# EAGLE board CS42448_2 (EAGLE 7.2.0)
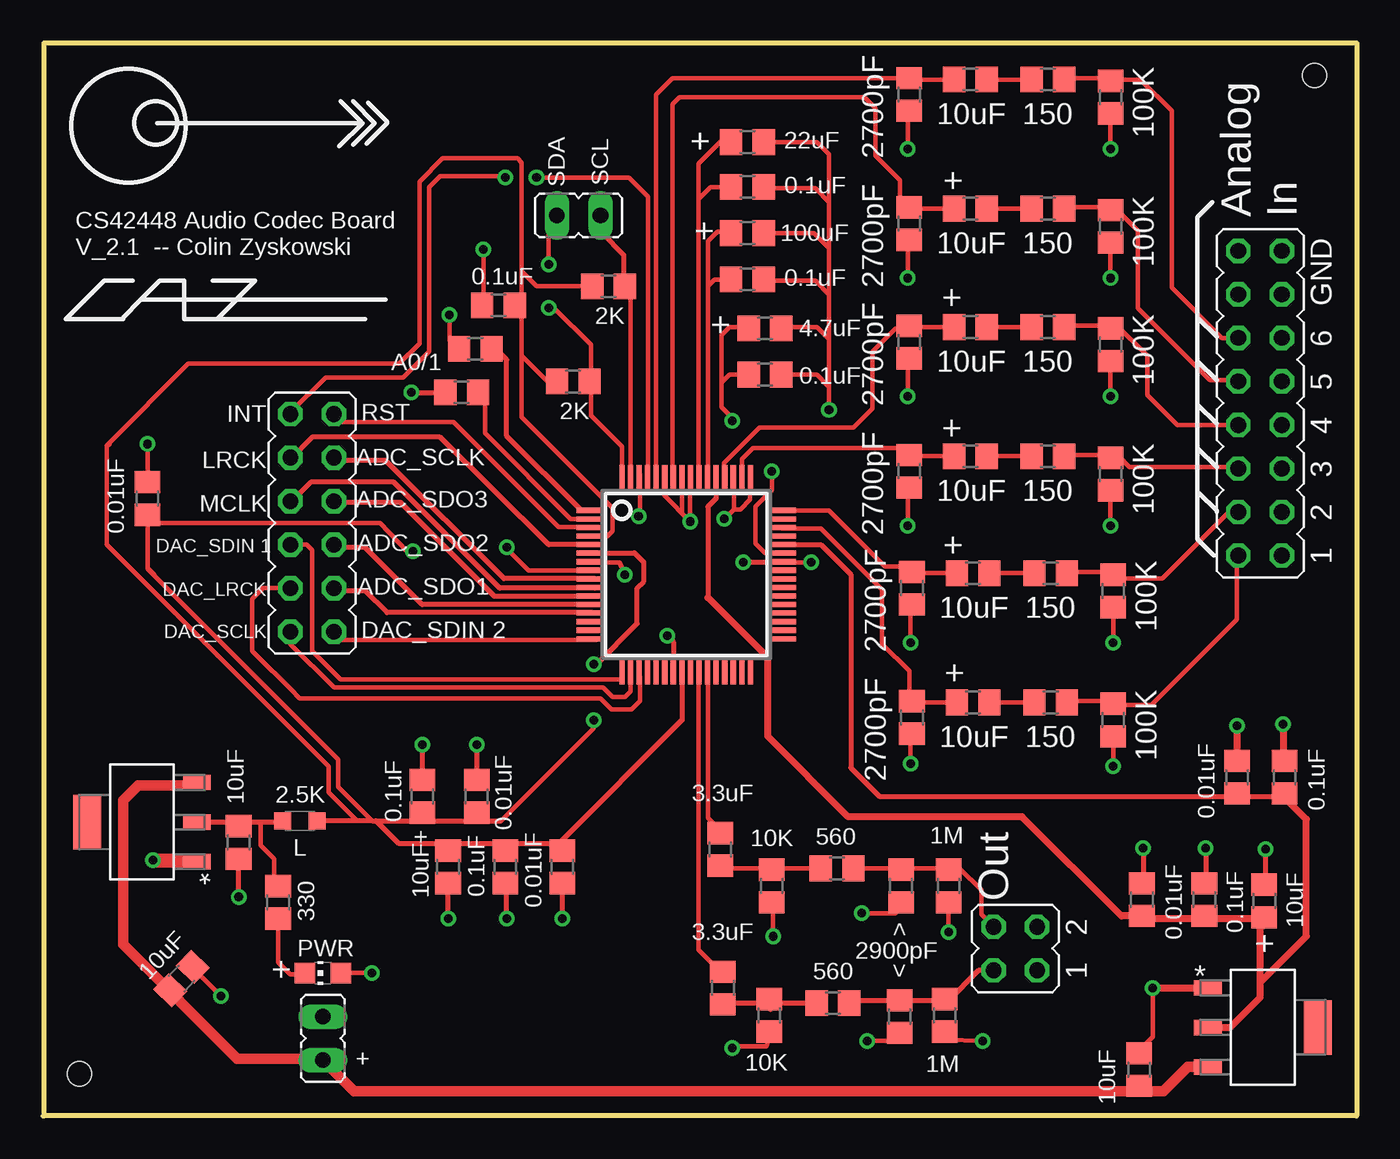
[diagram p0: board, top side]
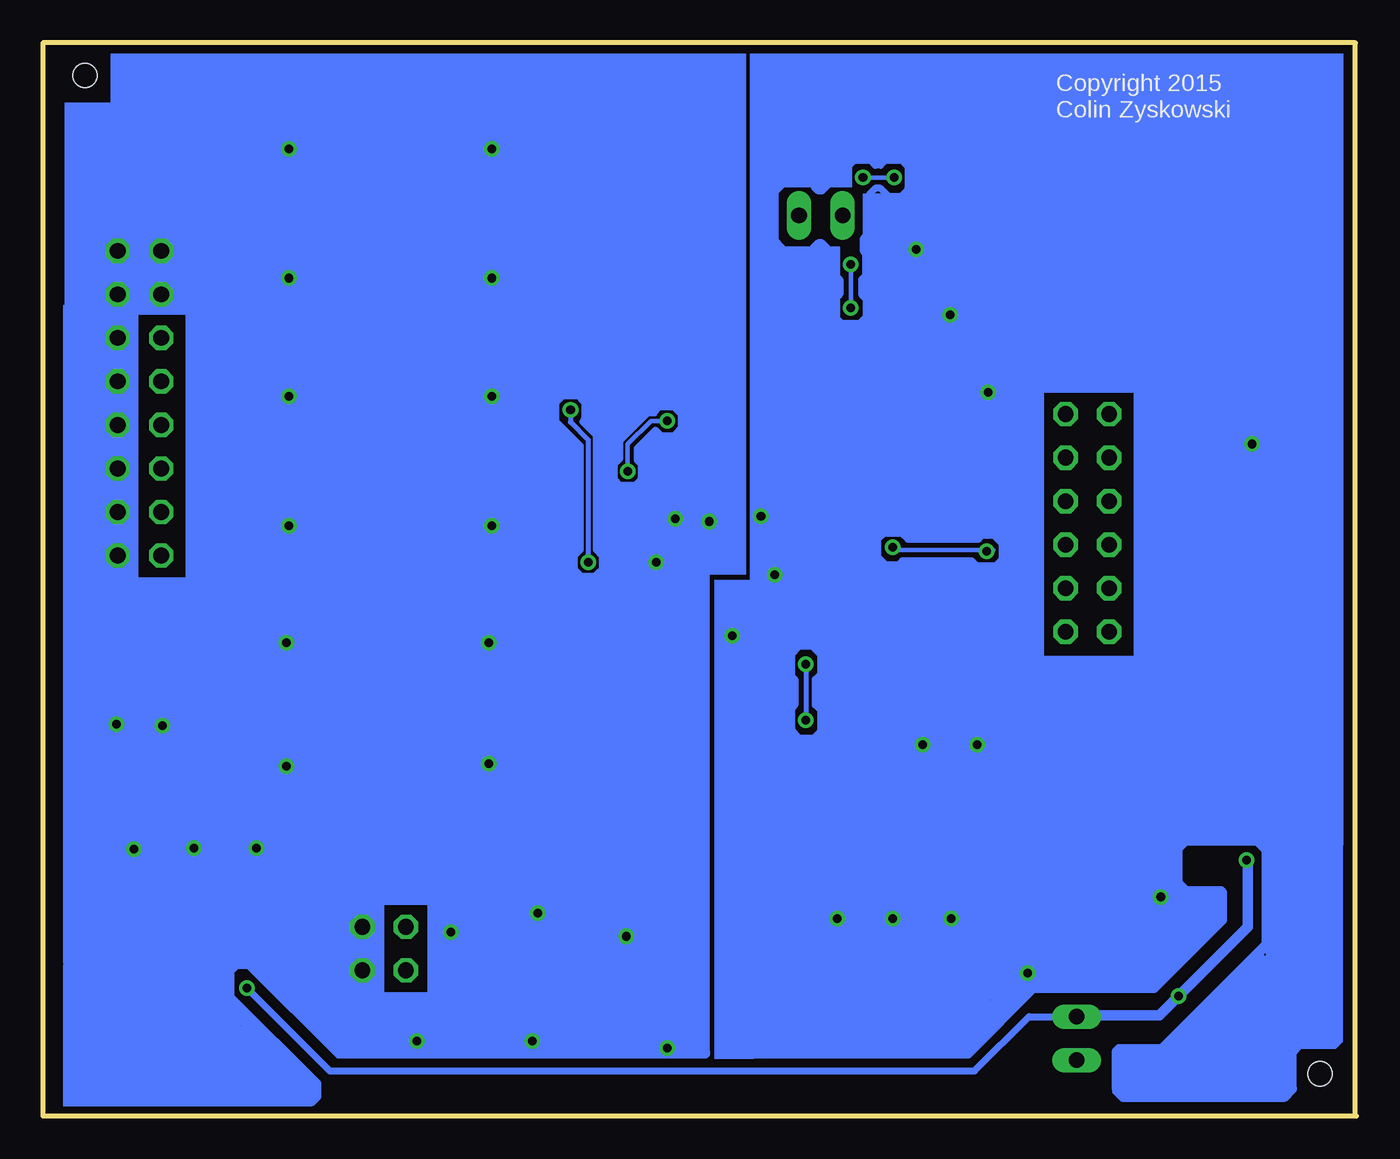
[diagram p1: board, bottom side, seen from below]

Size 76.68 x 62.63 mm. Coordinates in mm from the lower left corner, seen from the top.
Outline: 0,0 0.08,0
Outline: 0.08,0 0.08,62.63 76.68,62.63 76.68,0 0.08,0
Copper layers (1*16): Top 0.035mm / dielectric 1.5mm / Bottom 0.035mm
Design rules "default": minimum track width 10mil, minimum drill 24mil, track to track 8mil, track to pad 8mil, pad to pad 8mil, via to via 8mil, smd to smd 8mil, copper to edge 40mil, drill to drill 8mil, minimum pad ring 10mil, minimum via ring 8mil, stop-mask expansion 4mil, vias tented up to drill 0mil, thermal gap 10mil
Holes 1.4 mm at 2.14,2.46 74.22,60.72

## Footprints (pad centres in the part's own frame; a part is rotated, then mirrored left to right if it is on the bottom)
TQFP64 = smd 0.3 x 1.6: 1 -3.75,-5.6; 2 -3.25,-5.6; 3 -2.75,-5.6; 4 -2.25,-5.6; 5 -1.75,-5.6; 6 -1.25,-5.6; 7 -0.75,-5.6; 8 -0.25,-5.6; 9 0.25,-5.6; 10 0.75,-5.6; 11 1.25,-5.6; 12 1.75,-5.6; 13 2.25,-5.6; 14 2.75,-5.6; 15 3.25,-5.6; 16 3.75,-5.6; 33 3.75,5.6; 34 3.25,5.6; 35 2.75,5.6; 36 2.25,5.6; 37 1.75,5.6; 38 1.25,5.6; 39 0.75,5.6; 40 0.25,5.6; 41 -0.25,5.6; 42 -0.75,5.6; 43 -1.25,5.6; 44 -1.75,5.6; 45 -2.25,5.6; 46 -2.75,5.6; 47 -3.25,5.6; 48 -3.75,5.6 | smd 1.6 x 0.3: 17 5.6,-3.75; 18 5.6,-3.25; 19 5.6,-2.75; 20 5.6,-2.25; 21 5.6,-1.75; 22 5.6,-1.25; 23 5.6,-0.75; 24 5.6,-0.25; 25 5.6,0.25; 26 5.6,0.75; 27 5.6,1.25; 28 5.6,1.75; 29 5.6,2.25; 30 5.6,2.75; 31 5.6,3.25; 32 5.6,3.75; 49 -5.6,3.75; 50 -5.6,3.25; 51 -5.6,2.75; 52 -5.6,2.25; 53 -5.6,1.75; 54 -5.6,1.25; 55 -5.6,0.75; 56 -5.6,0.25; 57 -5.6,-0.25; 58 -5.6,-0.75; 59 -5.6,-1.25; 60 -5.6,-1.75; 61 -5.6,-2.25; 62 -5.6,-2.75; 63 -5.6,-3.25; 64 -5.6,-3.75
SOT230P700X180-4N = smd 1.626 x 0.889: 1 -3.2,2.311; 2 -3.2,0; 3 -3.2,-2.311 | smd 1.626 x 3.175: 4 3.2,0
JP6Q = drill 0.914 octagon: 1 -6.35,-1.27; 2 -6.35,1.27; 3 -3.81,-1.27; 4 -3.81,1.27; 5 -1.27,-1.27; 6 -1.27,1.27; 7 1.27,-1.27; 8 1.27,1.27; 9 3.81,-1.27; 10 3.81,1.27; 11 6.35,-1.27; 12 6.35,1.27
JP8Q = drill 0.914 octagon: 1 -8.89,-1.27; 2 -8.89,1.27; 3 -6.35,-1.27; 4 -6.35,1.27; 5 -3.81,-1.27; 6 -3.81,1.27; 7 -1.27,-1.27; 8 -1.27,1.27; 9 1.27,-1.27; 10 1.27,1.27; 11 3.81,-1.27; 12 3.81,1.27; 13 6.35,-1.27; 14 6.35,1.27; 15 8.89,-1.27; 16 8.89,1.27
JP2Q = drill 0.914 octagon: 1 -1.27,-1.27; 2 1.27,-1.27; 3 -1.27,1.27; 4 1.27,1.27
R0805 = smd 1.3 x 1.5: 1 -0.95,0; 2 0.95,0
JP1Y = drill 0.914 long: 1 0,-1.27; 2 0,1.27
L2012C = smd 1 x 1: 1 -1,0; 2 1,0
CHIP-LED0805 = smd 1.2 x 1.2: A 0,-1.05; C 0,1.05

## Placement (x,y rotation side)
E$1  [TQFP64]  37.54,31.59 270 top
E$2  [SOT230P700X180-4N]  5.79,17.14 180 top
E$3  [SOT230P700X180-4N]  71.2,5.16 0 top
E$4  [JP6Q]  15.72,34.61 90 top
E$5  [JP8Q]  71.04,41.59 90 top
E$6  [JP2Q]  56.75,9.76 90 top
E$7  [R0805]  33.02,48.42 0 top
E$8  [R0805]  26.59,47.31 0 top
E$9  [R0805]  23.65,14.53 90 top
E$10  [R0805]  26.99,14.53 90 top
E$11  [R0805]  30.32,14.53 90 top
E$12  [R0805]  22.15,18.65 90 top
E$13  [R0805]  25.32,18.65 90 top
E$14  [R0805]  30.96,42.86 0 top
E$15  [JP1Y]  31.27,52.55 90 top
E$16  [JP1Y]  16.35,4.52 180 top
E$17  [R0805]  50.56,45.16 90 top
E$18  [R0805]  54.13,46.04 0 top
E$19  [R0805]  58.66,46.04 0 top
E$20  [R0805]  62.31,45.01 90 top
E$21  [R0805]  50.56,37.62 90 top
E$22  [R0805]  54.13,38.5 0 top
E$23  [R0805]  58.66,38.5 0 top
E$24  [R0805]  62.31,37.47 90 top
E$25  [R0805]  50.72,30.8 90 top
E$26  [R0805]  54.29,31.67 0 top
E$27  [R0805]  58.82,31.67 0 top
E$28  [R0805]  62.47,30.64 90 top
E$29  [R0805]  50.72,23.26 90 top
E$30  [R0805]  54.29,24.13 0 top
E$31  [R0805]  58.82,24.13 0 top
E$32  [R0805]  62.47,23.1 90 top
E$33  [R0805]  50.56,59.61 90 top
E$34  [R0805]  54.13,60.48 0 top
E$35  [R0805]  58.66,60.48 0 top
E$36  [R0805]  62.31,59.45 90 top
E$37  [R0805]  50.56,52.07 90 top
E$38  [R0805]  54.13,52.94 0 top
E$39  [R0805]  58.66,52.94 0 top
E$40  [R0805]  62.31,51.91 90 top
E$41  [R0805]  41.12,56.83 180 top
E$42  [R0805]  41.12,54.21 180 top
E$43  [R0805]  42.15,45.96 180 top
E$44  [R0805]  41.12,48.82 180 top
E$45  [R0805]  41.12,51.51 180 top
E$46  [R0805]  42.15,43.26 180 top
E$47  [R0805]  39.53,15.56 90 top
E$48  [R0805]  46.35,14.45 0 top
E$49  [R0805]  52.86,13.41 90 top
E$50  [R0805]  42.55,13.41 90 top
E$51  [R0805]  50.09,13.41 90 top
E$52  [R0805]  39.69,7.46 90 top
E$53  [R0805]  46.12,6.59 0 top
E$54  [R0805]  52.63,5.87 90 top
E$55  [R0805]  42.39,5.87 90 top
E$56  [R0805]  50.01,5.79 90 top
E$57  [R0805]  6.11,36.04 90 top
E$58  [R0805]  71.28,12.54 270 top
E$59  [R0805]  67.79,12.62 270 top
E$60  [R0805]  64.14,12.62 270 top
E$61  [R0805]  72.47,19.76 270 top
E$62  [R0805]  69.69,19.76 270 top
E$63  [R0805]  24.45,42.23 0 top
E$64  [R0805]  25.24,44.77 0 top
E$65  [R0805]  8.1,8.02 46.2 top
E$66  [L2012C]  15,17.22 0 top
E$67  [CHIP-LED0805]  16.35,8.33 90 top
E$68  [R0805]  13.73,12.46 90 top
E$69  [R0805]  11.43,15.95 90 top
E$70  [R0805]  63.98,2.7 90 top

## Library data of the parts
E$1 = plxtech
E$2 E$3 = LD1117s_VoltageRegulator
E$4 E$6 E$15 E$16 = jumper
E$5 = jumper8
E$7-E$14 E$17-E$66 E$68-E$70 = eagle-ltspice
E$67 = led

## Nets
S$3: E$15.2
S$31: E$4.4
S$35: E$4.2
S$69: E$5.8
S$71: E$5.12
S$99: E$6.4
S$110: E$16.1

## Tracks (layer width: path | path; a pad name or v marks a point on that pad's centre or on a via)
S$1
  Top 0.254: 34.29,24.92 34.29,25.4
S$2
  Top 0.254: 13.73,11.35 13.73,8.97 14.45,8.26 15.32,8.26
S$3  (via drill 0.5 pad 0.25)
  Top 0.254: v29.53,47.15 29.84,47.15 31.99,45.01 31.99,40.88 33.81,39.05 33.81,37.39 | v29.53,49.69 29.53,52.07 E$15.2
  Bottom 0.254: v29.53,47.15 v29.53,49.69
S$4
  Top 0.254: 31.75,34.85 30.8,34.85 25.8,39.85 25.8,41.83 25.48,42.15
S$5
  Top 0.305: 31.43,35.32 27.07,39.69 27.07,44.13 26.27,44.93
S$6  (via drill 0.5 pad 0.25)
  Top 0.254: v25.72,50.56 25.72,47.39
S$8
  Top 0.305: 32.15,33.34 29.53,33.34 23.18,39.61 15.72,39.61 14.37,38.26
S$9
  Top 0.305: 32.23,31.35 26.91,31.35 20,38.26 16.83,38.26
S$10
  Top 0.305: 32.23,30.8 26.67,30.8 20.48,36.99 15.64,36.99 14.37,35.72
S$11  (via drill 0.5 pad 0.25)
  Top 0.305: v30.32,11.51 30.32,13.34
S$12  (via drill 0.5 pad 0.25)
  Top 0.305: v25.32,21.67 25.32,19.61
S$13
  Top 0.254: 6.11,34.92 6.11,31.99 6.51,31.59
S$14  (via drill 0.5 pad 0.25)
  Top 0.305: 36.83,26.27 36.83,27.62 v36.43,28.02
S$15
  Top 0.305: 32.62,52.63 32.62,51.51 33.89,50.24 33.89,48.5 33.97,48.42
S$16  (via drill 0.5 pad 0.25)
  Top 0.305: v64.21,15.64 64.21,13.49
S$17
  Top 0.254: 31.51,34.37 30.08,34.37 23.97,40.48 17.14,40.48 16.91,40.72
S$18  (via drill 0.5 pad 0.25)
  other vias: 27.07,33.18
S$19
  Top 0.254: 34.29,37.23 34.29,47.94 33.89,48.34
S$20  (via drill 0.5 pad 0.25)
  Top 0.254: 31.99,32.31 33.66,32.31 v33.97,31.59
S$21
  Top 0.305: 31.99,30.32 26.35,30.32 20.88,35.8 16.99,35.8 16.91,35.72
S$22
  Top 0.305: 32.07,29.84 22.15,29.84 18.81,33.18 16.99,33.18
S$23
  Top 0.305: 32.07,29.37 20.08,29.37 18.81,30.64 16.91,30.64
S$24  (via drill 0.5 pad 0.25)
  Top 0.254: v21.59,32.94 21.27,32.94 19.68,34.61 6.51,34.61 6.19,34.85
S$25
  Bottom 0.254: 21.19,33.02 27.07,33.02
S$26
  Top 0.254: 32.07,31.83 28.34,31.83 27.07,33.1
S$27  (via drill 0.5 pad 0.25)
  Top 0.254: v6.11,39.21 6.11,37.23
S$28  (via drill 0.5)
  Top 0.813: v6.43,14.92 9.05,14.92 9.05,14.84
S$29
  Top 0.406: 8.57,19.76 8.89,19.45
S$30  (via drill 0.5 pad 0.25)
  Top 0.254: 41.27,37.47 41.27,35.96 40.72,35.4 40.32,35.4 | 40.32,37.39 40.32,35.4 | 40.32,35.4 v39.77,34.85
S$31
  Top 0.254: 34.85,25.64 34.85,24.21 34.37,23.73 33.18,23.73 32.54,24.37 28.57,24.37 28.34,24.37 15,24.37 14.76,24.61 14.68,24.69 12.22,27.15 12.22,30.16 12.86,30.8 E$4.4
S$32
  Top 0.254: 3.81,39.21 8.49,43.89 20.8,43.89 21.99,45.09 21.99,54.53 23.34,55.88 27.7,55.88 27.94,55.64 27.94,49.29 | 32.07,48.42 28.81,48.42 27.94,49.29 | 29.69,42.86 29.45,42.86 27.94,44.37 | 27.94,44.37 27.94,49.29 | 27.94,44.37 27.94,40.8 33.26,35.48 33.26,34.13 32.94,33.81 31.67,33.81
S$33
  Top 0.254: 32.31,27.78 17.3,27.78 16.91,28.18
S$34  (via drill 0.5 pad 0.25)
  Top 0.254: v32.15,23.1 32.15,22.62 26.75,17.22 | 6.11,31.91 17.22,20.8 17.22,19.21 19.21,17.22 | 18.34,17.22 16.67,18.89 16.67,20.4 3.73,33.34 3.73,39.05 3.89,39.21 3.81,39.21 3.73,39.13
  Top 0.305: 31.99,32.86 34.53,32.86 35.08,32.31 35.08,31.19 34.69,30.8 34.69,28.73 32.31,26.35 v32.15,26.35 | 37.31,26.19 37.31,23.1 30.08,15.88 20.8,15.88 19.45,17.22 | 19.45,17.22 26.75,17.22 | 19.45,17.22 19.21,17.22 18.34,17.22 15.95,17.22
  Bottom 0.305: v32.15,26.35 v32.15,23.1
S$35
  Top 0.254: E$4.2 14.45,27.54 16.99,25 32.7,25 33.26,24.45 33.97,24.45 34.29,24.77 34.29,25.56
S$36
  Top 0.254: 62.47,46.12 59.85,46.12 59.77,46.04
S$37
  Top 0.254: 57.63,46.04 55.32,46.04 55.24,46.12
S$38
  Top 0.254: 53.18,46.04 50.8,46.04 50.72,46.12
S$39  (via drill 0.5 pad 0.25)
  Top 0.254: v50.48,41.99 50.48,44.13
S$40  (via drill 0.5 pad 0.25)
  Top 0.254: v62.31,41.99 62.31,43.97
S$41
  Top 0.254: 62.47,38.58 59.85,38.58 59.77,38.5
S$42
  Top 0.254: 57.63,38.5 55.32,38.5 55.24,38.58
S$43
  Top 0.254: 53.18,38.5 50.8,38.5 50.72,38.58
S$44  (via drill 0.5 pad 0.25)
  Top 0.254: v50.48,34.45 50.48,36.59
S$45  (via drill 0.5 pad 0.25)
  Top 0.254: v62.31,34.45 62.31,36.43
S$46
  Top 0.254: 62.63,31.75 60.01,31.75 59.93,31.67
S$47
  Top 0.254: 57.78,31.67 55.48,31.67 55.4,31.75
S$48
  Top 0.254: 53.34,31.67 50.96,31.67 50.88,31.75
S$49  (via drill 0.5 pad 0.25)
  Top 0.254: v50.64,27.62 50.64,29.77
S$50  (via drill 0.5 pad 0.25)
  Top 0.254: v62.47,27.62 62.47,29.61
S$51
  Top 0.254: 62.63,24.21 60.01,24.21 59.93,24.13
S$52
  Top 0.254: 57.78,24.13 55.48,24.13 55.4,24.21
S$53
  Top 0.254: 53.34,24.13 50.96,24.13 50.88,24.21
S$54  (via drill 0.5 pad 0.25)
  Top 0.254: v50.64,20.56 50.64,22.23
S$55  (via drill 0.5 pad 0.25)
  Top 0.254: v62.47,20.4 62.47,22.07
S$56
  Top 0.254: 50.24,45.88 50.32,45.96 | 50.32,45.96 49.77,45.96 48.42,44.61 48.42,41.27 47.31,40.16 41.83,40.16 39.77,38.1 39.77,37.23 | 50.32,45.96 50.4,46.04
S$57
  Top 0.254: 57.63,60.48 55.32,60.48 55.24,60.56
S$58
  Top 0.254: 53.18,60.48 50.8,60.48 50.72,60.56
S$59  (via drill 0.5 pad 0.25)
  Top 0.254: v50.48,56.44 50.48,58.58
S$60  (via drill 0.5 pad 0.25)
  Top 0.254: v62.31,56.44 62.31,58.42
S$61
  Top 0.254: 62.47,53.02 59.85,53.02 59.77,52.94
S$62
  Top 0.254: 57.63,52.94 55.32,52.94 55.24,53.02
S$63
  Top 0.254: 53.18,52.94 50.8,52.94 50.72,53.02
S$64  (via drill 0.5 pad 0.25)
  Top 0.254: v50.48,48.9 50.48,51.04
S$65  (via drill 0.5 pad 0.25)
  Top 0.254: v62.31,48.9 62.31,50.88
S$66
  Top 0.254: 69.69,32.7 69.69,28.97 64.69,23.97 62.39,23.97
S$67
  Top 0.254: 69.85,35.32 69.29,35.32 65.33,31.35 62.31,31.35 62.15,31.51
S$68
  Top 0.254: 69.77,37.86 63.42,37.86 62.79,38.5
S$69
  Top 0.254: E$5.8 66.2,40.32 64.45,42.07 64.45,44.37 62.55,46.28
S$70
  Top 0.254: 69.93,42.94 68.1,42.94 63.9,47.15 63.9,51.67 62.55,53.02
S$71
  Top 0.254: E$5.12 68.82,45.4 65.88,48.34 65.88,58.66 64.06,60.48 62.15,60.48 62.07,60.56 | 62.47,60.56 62.07,60.56 | 62.07,60.56 59.85,60.56 59.77,60.48
S$72  (via drill 0.5 pad 0.25)
  Top 0.254: 34.85,37.47 34.85,35.08 v34.77,35
S$73
  Top 0.254: 35.8,37.23 35.8,59.61 36.75,60.56 50.48,60.56
S$74  (via drill 0.5 pad 0.25)
  Top 0.254: 37.78,37.54 v37.78,34.69 | 37.31,37.39 37.31,35.16 v37.78,34.69 | 36.27,37.23 36.27,36.2 v37.78,34.69
S$75
  Top 0.254: 50.72,60.48 50.8,60.56
S$76
  Top 0.254: 40.8,37.07 40.8,38.34 41.43,38.97 50.24,38.97 50.64,38.58
S$77
  Top 0.254: 43.1,35.32 45.88,35.32 49.13,32.07 50.72,32.07 50.88,32.23
S$78
  Top 0.254: 43.1,34.29 45.4,34.29 48.97,30.72 48.97,27.54 50.56,25.96 50.56,24.45 50.72,24.29
S$79
  Top 0.254: 43.1,32.31 45.01,32.31
S$80  (via drill 0.5 pad 0.25)
  other vias: 44.85,32.31
S$81
  Top 0.254: 36.75,37.15 36.75,59.05 37.15,59.45 47.94,59.45 48.58,58.82 48.58,56.04 50.01,54.61 50.01,53.66 50.64,53.02
S$82
  Top 0.254: 50.48,52.86 50.56,52.94
S$83
  Top 0.254: 38.26,37.15 38.26,53.5 | 38.26,53.5 38.26,55.56 39.61,56.91 40.08,56.91 | 40.08,54.21 38.97,54.21 38.26,53.5
S$84
  Top 0.254: 38.81,37.23 38.81,48.42 | 38.81,48.42 38.81,51.04 39.37,51.59 40.24,51.59 | 40.08,48.82 39.21,48.82 38.81,48.42
S$85
  Top 0.254: 41.99,54.13 45.09,54.13 45.88,53.34 | 45.88,53.34 45.88,50.64 | 45.88,50.64 45.88,47.94 | 45.88,47.94 45.88,45.32 | 45.88,45.32 45.88,41.2 | 42.07,56.83 45.16,56.83 45.88,56.12 45.88,53.34 | 42.15,51.51 45.01,51.51 45.88,50.64 | 42.15,48.74 45.09,48.74 45.88,47.94 | 43.26,46.04 45.16,46.04 45.88,45.32
S$86  (via drill 0.5 pad 0.25)
  Bottom 0.305: v45.88,41.2 45.88,40.48 44.85,39.45 44.85,32.31
S$87  (via drill 0.5 pad 0.25)
  Top 0.254: 43.58,32.86 42.15,32.86 41.59,33.42 41.59,35.56 42.55,36.51 v42.55,37.62
  Bottom 0.254: v42.55,37.62 42.55,39.21 41.2,40.56 40.32,40.56 40.24,40.48
S$88  (via drill 0.5 pad 0.25)
  Top 0.254: v40.24,40.56 40.24,40.72 39.61,41.35 39.61,42.78 | 39.61,42.78 39.61,45.56 40.08,46.04 41.2,46.04 | 41.04,43.26 40.08,43.26 39.61,42.78
S$89
  Top 0.254: 43.26,43.26 45.16,43.26 45.8,42.62
S$90
  Bottom 0.406: 37.07,3.73 37.07,15.32 37.15,15.4
S$91
  Top 0.254: 39.77,14.45 42.55,14.45 | 42.55,14.45 42.62,14.37 | 42.55,14.45 45.4,14.45
S$92
  Top 0.254: 47.55,14.45 52.63,14.45
S$93
  Top 0.254: 42.39,6.27 42.47,6.19
S$94
  Top 0.305: 39.93,6.59 45.09,6.59
S$95
  Top 0.254: 53.26,14.21 53.02,14.45
S$96
  Top 0.305: 55.4,8.49 54.61,8.49 52.78,6.67
S$97  (via drill 0.5 pad 0.25)
  Top 0.254: v42.62,10.48 42.62,12.22
S$98  (via drill 0.5 pad 0.25)
  other vias: 40.24,3.97
S$99
  Top 0.254: E$6.4 54.77,11.75 54.77,13.18 53.5,14.45 52.94,14.45
S$100  (via drill 0.5 pad 0.25)
  Top 0.254: v54.85,4.37 52.63,4.45 52.55,4.52
S$101  (via drill 0.5 pad 0.25)
  Top 0.254: v48.1,4.37 50.32,4.37
S$102  (via drill 0.5 pad 0.25)
  Top 0.254: v47.78,11.83 49.77,11.83 50.09,12.14
S$103  (via drill 0.5)
  Top 0.406: v64.77,7.46 68.1,7.46
  Bottom 0.406: v64.77,7.46 59.93,2.62 22.3,2.62 19.13,5.79 16.27,5.79 16.11,5.95
S$104
  Top 0.254: 38.81,25.4 38.81,22.3 38.81,22.23 38.81,17.38 39.53,16.67
S$105
  Top 0.61: 16.35,3.33 11.35,3.33 4.68,10 4.68,18.41 5.56,19.29 8.97,19.29 9.13,19.45
S$106
  Top 0.305: 64.06,11.91 64.06,11.27
S$107  (via drill 0.5)
  Top 0.254: 35.32,37.78 35.32,53.66 34.21,54.77 v28.81,54.77 28.73,54.77
  Bottom 0.254: v26.99,54.77 v28.81,54.77
S$108  (via drill 0.5)
  Top 0.406: v69.69,22.78 69.69,20.8
S$109
  Top 0.305: 72.39,20.64 72.39,21.11
S$110  (via drill 0.5)
  Top 0.254: v10.4,6.99 8.73,8.65
  Bottom 0.61: 6.35,14.92 6.35,11.03 v10.4,6.99 11.51,5.87 16.27,5.87 E$16.1
S$111  (via drill 0.5 pad 0.25)
  Top 0.305: v22.15,21.67 22.15,19.76
S$112
  Top 0.254: 14.45,41.04 16.51,43.1 21.03,43.1 22.54,44.61 22.54,54.21 23.18,54.85 26.99,54.85
S$113  (via drill 0.5 pad 0.25)
  Top 0.305: v23.65,11.51 23.65,13.34
S$114  (via drill 0.5 pad 0.25)
  Top 0.305: v27.07,11.51 27.07,13.41
S$115  (via drill 0.5)
  Top 0.406: v72.39,22.86 72.39,20.95 72.47,20.88
S$116  (via drill 0.5 pad 0.25)
  Top 0.305: v71.36,15.56 71.36,13.34
S$117  (via drill 0.5 pad 0.25)
  Top 0.305: v67.87,15.64 67.87,13.34
S$118  (via drill 0.5 pad 0.25)
  Top 0.254: v52.86,10.72 52.86,12.46
S$120
  Top 0.254: 40.24,4.05 42.23,4.05 42.47,4.76
S$121
  Top 0.305: 39.29,37.62 39.29,36.04 38.81,35.56 38.81,30.24 | 71.28,11.83 71.28,11.51 71.28,11.03 | 43.5,33.34 45.4,33.34 47.15,31.59 47.15,20.32 48.82,18.65 72.39,18.65 72.47,18.65 72.71,18.89
  Top 0.406: 68.34,5.16 69.29,5.16 71.04,6.91 71.04,7.78 | 71.04,7.78 73.74,10.48 73.74,17.3 72.39,18.65 | 71.04,7.78 71.04,11.27 71.28,11.51 64.37,11.51 64.21,11.67 62.94,11.67 57.15,17.46 46.99,17.46 42.31,22.15 42.31,26.75 38.81,30.24
S$122
  Top 0.305: 67.79,11.91 67.79,11.19
S$123
  Top 0.61: 68.26,2.86 66.83,2.86 65.41,1.43 18.18,1.43 16.43,3.17
S$124
  Top 0.406: 63.9,11.43 63.82,11.51
S$125
  Top 0.254: 38.26,25.4 38.26,22.7 38.26,22.62 38.26,9.68 39.61,8.33
S$126
  Bottom 0.305: 4.29,1.35 4.05,1.35 3.65,1.75 3.65,3.65 3.25,4.05 1.27,4.05 1.03,4.29 1.03,16.03 1.43,16.43 1.43,16.19 0.95,15.72 0.95,4.37 3.1,4.37 3.89,3.57 3.89,1.83 4.05,1.67 4.05,1.91 4.13,1.98 5.08,1.98 5.16,2.06 5.16,15.8 5.24,15.88 1.43,15.88 1.11,15.56 5,15.56 5.08,15.64 5.08,2.38 4.92,2.22 4.05,2.22 4.05,15.56 4.13,15.64 | 4.13,15.64 4.52,15.64 | 4.52,15.64 4.6,15.64 4.92,15.32 4.92,2.54 4.84,2.46 4.29,2.46 4.29,15.32 4.68,15.32 4.68,2.62 4.52,2.62 4.52,15.64 | 4.13,15.64 3.97,15.64 3.81,15.48 3.81,3.89 3.57,4.13 3.57,15.4 3.41,15.4 3.41,4.45 3.33,4.37 3.25,4.37 3.17,4.45 3.17,15.4 1.19,15.4 1.19,4.52
S$127
  Top 0.305: 46.99,6.75 52.55,6.75 52.63,6.83
S$128
  Bottom 0.254: 39.61,39.77 41.27,39.77 | 41.27,39.77 42.07,38.97 42.07,38.26 41.83,38.02 | 41.83,38.02 41.83,38.81 41.91,38.89 41.83,38.89 41.12,39.61 39.77,39.61 39.69,39.69 39.69,38.34 39.77,38.26 41.67,38.26 41.67,38.81 41.04,39.45 39.93,39.45 39.85,39.37 39.85,38.42 41.51,38.42 41.51,38.73 41.43,38.73 40.88,39.29 40.01,39.29 40.01,38.66 40.08,38.58 41.35,38.58 40.8,39.13 40.24,39.13 40.24,38.97 40.08,38.81 40.96,38.81 41.04,38.73 40.96,38.73 40.72,38.97 40.32,38.97 40.32,39.53 40.88,40.08 40.96,40.08 41.27,39.77 | 41.83,36.91 41.83,37.15 41.83,38.02
  Bottom 0.305: 42.07,36.83 42.07,36.91 41.83,37.15
S$129
  Bottom 0.254: 41.91,40.48 41.2,41.2 41.43,41.2 41.83,40.8 41.83,41.04 41.75,41.12
S$130
  Bottom 0.254: 43.18,39.13 42.94,39.37 | 42.94,39.37 41.35,40.96 | 41.35,40.96 41.04,41.27 41.35,41.27 43.26,39.37 43.26,39.61 42.47,40.4 42.7,40.4 43.18,39.93 43.18,40.24 43.02,40.4 | 41.35,40.96 40.96,40.96 40.72,41.27 40.88,41.2 41.04,41.04 | 42.94,39.37 42.94,38.34 43.18,38.1 43.18,38.97 43.1,39.05
S$131
  Bottom 0.254: 39.53,40.96 39.85,41.27
S$132
  Bottom 0.305: 39.77,39.69 39.77,39.85 39.45,40.16 39.45,40.96 39.53,41.04 39.53,44.13 35.8,44.13 35.8,37.94 39.05,37.94 39.61,38.5 39.61,39.61 39.37,39.85 39.37,43.81 39.29,43.89 39.21,43.89 | 39.21,43.89 36.04,43.89 36.04,38.26 39.13,38.26 39.21,38.34 39.21,39.53 | 39.21,39.53 39.21,39.61 | 39.21,39.61 39.37,39.77 39.37,38.58 39.45,38.5 39.45,39.29 39.21,39.53 | 39.21,39.61 39.21,43.89
S$133
  Bottom 0.254: 44.05,39.29 45.24,40.48 45.16,40.64
S$134
  Bottom 0.254: 45.09,41.51 45.16,41.67 45.48,41.99
S$135
  Bottom 0.254: 46.75,41.43 46.75,41.51 46.28,41.99
S$136
  Bottom 0.254: 44.13,39.53 44.93,40.32 44.29,40.32 44.21,40.24 | 44.21,40.24 44.21,40.01 44.29,39.93 44.61,40.24 44.21,40.24
S$137
  Bottom 0.254: 45.16,31.51 45.64,31.99
S$138
  Bottom 0.254: 44.45,31.59 44.21,31.83
S$139
  Bottom 0.254: 44.21,32.78 44.45,33.02 44.45,39.77 44.05,40.16 44.05,39.53 44.37,39.21 44.37,33.1 44.29,33.02
S$140
  Bottom 0.254: 45.56,32.7 45.24,33.02 45.24,39.13 45.56,39.45 | 45.56,39.45 45.56,39.37 45.72,39.37 | 45.56,39.45 45.72,39.61 | 45.72,39.61 46.2,40.08 | 46.51,39.37 45.72,39.37 | 45.72,39.37 46.43,40.08 | 46.43,40.08 46.43,39.53 46.35,39.45 46.2,39.45 46.12,39.53 46.28,39.69 | 45.72,39.61 45.72,39.37 | 45.72,39.37 45.4,39.05 45.4,32.94 | 46.67,41.83 46.67,40.56 46.2,40.08 | 46.2,40.08 46.43,40.08 | 46.43,40.08 46.67,40.32 46.67,39.37 46.59,39.29
S$141
  Bottom 0.61: 63.5,9.05 63.5,8.18 59.53,4.21 59.53,8.65 60.09,9.21 60.09,5.24 60.01,5.16 60.01,5.4 63.26,8.65 60.64,8.65 60.48,8.81 60.48,6.43 60.64,6.27 60.64,6.67 62.39,8.41 61.12,8.41 60.8,8.1 60.8,7.46 60.88,7.38 60.88,7.46 61.44,8.02
S$142
  Bottom 0.61: 37.07,3.65 22.7,3.65 18.89,7.46 11.83,7.46 7.86,11.43 7.86,13.02 7.94,13.1 10.4,13.1 10.48,13.18 10.48,21.43 10.72,21.67 10.72,20.72 10.95,20.48 18.49,20.48 18.65,20.64 18.65,20.32 18.18,19.84 11.11,19.84 10.79,20.16 10.79,12.86 10.72,12.78 8.33,12.78 8.33,11.59 8.49,11.43 8.49,11.35 12.3,7.54 12.38,7.54 12.62,7.78 12.62,7.86 8.81,11.67 8.81,12.46 10.87,12.46 10.95,12.38 10.95,9.92 13.1,7.78 13.1,8.1 9.21,11.99 10.64,11.99 10.64,11.27 10.56,11.19 10.56,11.27 10.24,11.59 10.24,11.19 13.65,7.78 18.97,7.78 19.05,7.7
S$143
  Bottom 0.406: 22.7,4.21 19.61,7.3 22.62,7.3 22.78,7.14 22.78,4.68 22.46,4.37 22.46,4.92 20.24,7.14 22.38,7.14 22.54,6.99 22.54,5.32 | 22.54,5.16 22.54,5.32 | 22.54,5.32 20.88,6.99 21.91,6.99 22.23,6.67 22.23,6.27 22.46,6.03 22.3,6.03 21.59,6.75 25.56,6.75 27.78,4.52
S$144
  Bottom 0.406: 26.43,33.89 26.19,33.66 22.07,33.66 21.83,33.89 21.19,33.89 20.72,33.42 20.72,32.46 21.27,31.91 21.99,31.91 22.46,32.38 26.51,32.38 26.75,32.15 27.46,32.15 27.94,32.62 27.94,33.66 27.54,34.05
S$145  (via drill 0.5)
  other vias: 40.88,32.31
S$146
  Top 0.305: 42.86,32.31 40.96,32.31
S$147  (via drill 0.5)
  Top 0.305: v21.51,42.23 23.65,42.23
S$148  (via drill 0.5)
  Top 0.254: v23.73,46.75 23.73,45.24 24.21,44.77
S$149
  Bottom 0.305: 40.96,40.01 40.96,39.85
S$150
  Bottom 0.305: 43.1,36.91 43.1,36.99 43.26,37.15
S$151
  Bottom 0.254: 43.26,37.07 43.26,38.02 43.42,38.18
S$152  (via drill 0.5)
  Top 0.254: v19.21,8.33 17.38,8.33
S$153
  Top 0.254: 14.53,33.34 15.4,33.34 15.72,33.02 15.72,27.15 17.38,25.48 33.81,25.48
S$154  (via drill 0.5)
  Top 0.305: v11.43,12.78 11.43,15
S$155
  Top 0.254: 64.77,7.38 64.77,4.6 63.98,3.81
S$156
  Top 0.254: 13.49,13.65 13.49,15 12.7,15.8 12.7,17.07 12.78,17.14
  Top 0.305: 9.13,17.14 12.78,17.14 13.73,17.14
S$157
  Bottom 0.61: 19.05,18.49 19.13,18.57 18.34,18.57 18.1,18.81 18.1,19.53 11.51,19.53 11.19,19.21 11.19,10.4 11.67,10.4 13.97,8.1 18.57,8.1 18.65,8.18 18.65,18.18 18.57,18.18 17.62,19.13 11.75,19.13 11.51,18.89 11.51,10.16 11.67,10
S$158
  Bottom 0.406: 32.94,22.54 32.94,22.46 32.54,22.07 31.67,22.07 31.27,22.46 31.27,23.65 31.59,23.97 31.59,25.48 31.27,25.8 31.27,26.91 31.75,27.38 32.54,27.38 33.02,26.91
S$159
  Bottom 0.406: 33.02,25.8 33.02,25.72 32.78,25.48 32.78,23.97 32.94,23.81
S$160
  Bottom 0.406: 26.19,54.13 26.19,54.05 26.59,53.66 27.3,53.66 27.78,54.13 28.1,54.13 28.42,53.82 28.42,51.59 28.81,51.2 28.81,50.48 28.65,50.32 28.65,49.05 28.89,48.82 28.89,47.94 28.65,47.7
S$161
  Bottom 0.406: 30.4,49.13 30.4,49.05 30.16,48.82 30.16,47.94 30.32,47.78
S$162
  Bottom 0.406: 28.57,46.75 28.57,46.67 29.13,46.12 29.92,46.12 30.4,46.59
S$163
  Bottom 0.406: 26.11,55.4 26.19,55.4 26.67,55.88 27.38,55.88 27.78,55.48 28.1,55.48 28.26,55.64
S$164
  Bottom 0.406: 29.29,55.8 29.69,55.4
S$165
  Bottom 0.406: 30.8,54.37 31.19,53.98 31.43,53.98 31.67,54.21
S$166
  Bottom 0.406: 30.88,50.56 30.88,50.64 31.19,50.96 31.43,50.96 31.75,50.64 31.35,50.64 31.27,50.72
S$167
  Bottom 0.406: 33.34,50.48 34.13,51.28 34.13,53.74 33.34,54.53
S$168
  Bottom 0.406: 60.64,8.97 63.34,8.97
S$169
  Bottom 0.406: 59.45,3.57 63.9,8.02 63.9,8.33 64.45,8.89 65.33,8.89 | 38.02,3.65 37.94,3.73 37.94,35.4 39.21,36.67 44.13,36.67 44.21,36.59 44.21,32.86 44.05,32.7 44.05,28.89 38.18,28.89 38.18,31.51 43.81,31.51 | 63.82,8.57 63.9,8.57 64.45,9.13 65.09,9.13 65.33,8.89 | 66.75,9.13 66.44,8.81 65.41,8.81 65.33,8.89
  Bottom 0.61: 63.82,9.37 63.82,8.57 63.74,8.1 59.37,3.65 38.02,3.65
S$170
  Bottom 0.305: 65.8,8.73 64.69,8.73 59.45,3.49 56.67,3.49
S$171
  Bottom 0.305: 66.67,8.89 75.33,8.89 75.33,8.02
S$173
  Bottom 0.61: 5.24,10.79 5.24,10 11.51,3.73 13.73,3.73 13.81,3.81 13.81,1.59 13.89,1.51 4.45,1.51 4.29,1.67 5.24,1.67 5.56,1.98 5.56,9.13 6.03,8.65 | 6.03,8.65 11.35,3.33 13.26,3.33 13.34,3.25 13.34,1.98 13.41,1.91 5.95,1.91 5.95,8.57 6.03,8.65 | 6.03,8.65 6.03,8.26 11.27,3.02 12.86,3.02 12.86,2.38 12.94,2.3 6.35,2.3 6.27,2.38 6.27,7.38 | 6.27,7.54 6.27,7.38 | 6.27,7.38 11.11,2.54 | 11.11,2.54 12.54,2.54 | 11.11,2.54 6.91,2.54 6.75,2.7 6.75,6.67 6.67,6.75 6.67,6.51 10.4,2.78 7.46,2.78 7.22,3.02 7.22,5.4 7.14,5.48 7.14,5.4 9.45,3.1 7.7,3.1 7.7,4.45 7.62,4.52 7.62,4.37 8.57,3.41 8.1,3.41 8.02,3.49
S$174
  Bottom 0.305: 5,1.35 13.97,1.35 14.13,1.51 14.13,3.81 13.89,4.05 10.16,4.05 10,4.21 10,5.4 5.4,10 5.4,16.19 5.48,16.27
S$175
  Bottom 0.305: 5.32,15.4 5.87,15.95
S$176
  Bottom 0.305: 9.92,15.95 10.32,15.56
S$177
  Bottom 0.305: 9.92,13.26 10.32,13.65
S$178
  Bottom 0.305: 66.83,0.71 60.96,0.71 60.56,1.11 60.56,1.91 65.64,6.99 | 65.33,8.81 65.33,8.73 66.04,8.02 66.04,8.1 65.64,8.49 65.64,6.99 | 65.64,6.67 65.64,0.79 65.72,0.71 | 65.64,6.99 65.64,6.67 | 65.64,6.67 60.72,1.75 60.72,1.27 61.12,0.87 65.33,0.87 65.41,0.95 65.41,6.19 60.88,1.67 60.88,1.35 61.2,1.03 65.25,1.03 65.25,5.64 | 65.25,5.71 65.25,5.64 | 65.25,5.64 61.12,1.51 61.12,1.43 61.44,1.11 64.93,1.11 65.01,1.19 65.01,5.08 | 65.01,5.16 65.01,5.08 | 65.01,5.08 61.44,1.51 61.44,1.43 61.59,1.27 64.85,1.27 64.85,4.6 61.67,1.43 64.69,1.43 64.69,4.13 62.15,1.59 64.61,1.59 64.61,3.65 | 64.61,3.81 64.61,3.65 | 64.61,3.65 62.63,1.67 64.53,1.67 64.53,3.25 | 64.53,3.41 64.53,3.25 | 64.53,3.25 63.1,1.83 64.14,1.83 | 64.14,1.83 64.21,1.83 | 64.21,1.83 64.37,1.83 64.37,2.78 64.29,2.78 63.26,1.75 64.14,1.75 64.21,1.83 | 64.21,1.83 64.21,1.91 | 63.98,2.22 64.14,2.38 64.21,2.38 64.21,2.22 | 63.74,1.98 63.66,1.91 63.74,1.91 | 63.9,1.91 64.21,1.91 | 64.21,1.91 64.21,2.22 | 64.21,2.22 63.9,1.91 | 63.9,1.91 63.74,1.91 | 63.74,1.91 63.74,1.98 | 63.74,1.98 63.98,2.22 | 63.98,2.22 63.98,1.98 64.14,1.83
S$179
  Bottom 0.305: 3.65,1.67 3.65,1.51 4.21,0.95 13.65,0.95 14.13,1.43 13.89,1.43 13.57,1.11 4.37,1.11 4.29,1.19
(copper drawn outside any net)
  shapes: Bottom area x63

## Text on the board
tPlace: 10uF | 150 | 100K | + | 22uF | 2700pF | SDA | SCL | 0.1uF | + | Analog / In | + | 100uF | CS42448 Audio Codec Board / V_2.1 -- Colin Zyskowski | 10uF | 150 | 100K | 0.1uF | 0.1uF | 2700pF | + | 2K | + | 4.7uF | A0/1 | 0.1uF | 10uF | 150 | 100K | RST | 2K | 2700pF | INT | + | LRCK | ADC_SCLK | 10uF | 150 | MCLK | ADC_SDO3 | 100K | 0.01uF | 2700pF | DAC_SDIN 1 | ADC_SDO2 | + | DAC_LRCK | ADC_SDO1 | 10uF | 150 | DAC_SCLK | DAC_SDIN 2 | 100K | 2700pF | + | 10uF | 150 | 0.01uF | 100K | 0.1uF | 2700pF | 10uF | 2.5K | 3.3uF | 0.1uF | 0.01uF | + | 10K | 560 | 1M | L | 0.01uF | 0.1uF | 10uF | 10uF | 0.1uF | Out | 0.01uF | 330 | 3.3uF | > | 2900pF | PWR | < | + | 10uF | + | 560 | 10uF | + | 10K | 1M
bPlace: Copyright 2015 / Colin Zyskowski